# Altium PCB TRUMAN_PCB.PcbDoc (part 1 of 5)
Units mil, origin at the board's own origin, x right, y up, seen from the top; angles counter-clockwise.
Board outline 8050 x 5340 mil, 2 copper layers (Top Layer, Bottom Layer); 272 components, 210 nets, 840 pads, 280 vias.
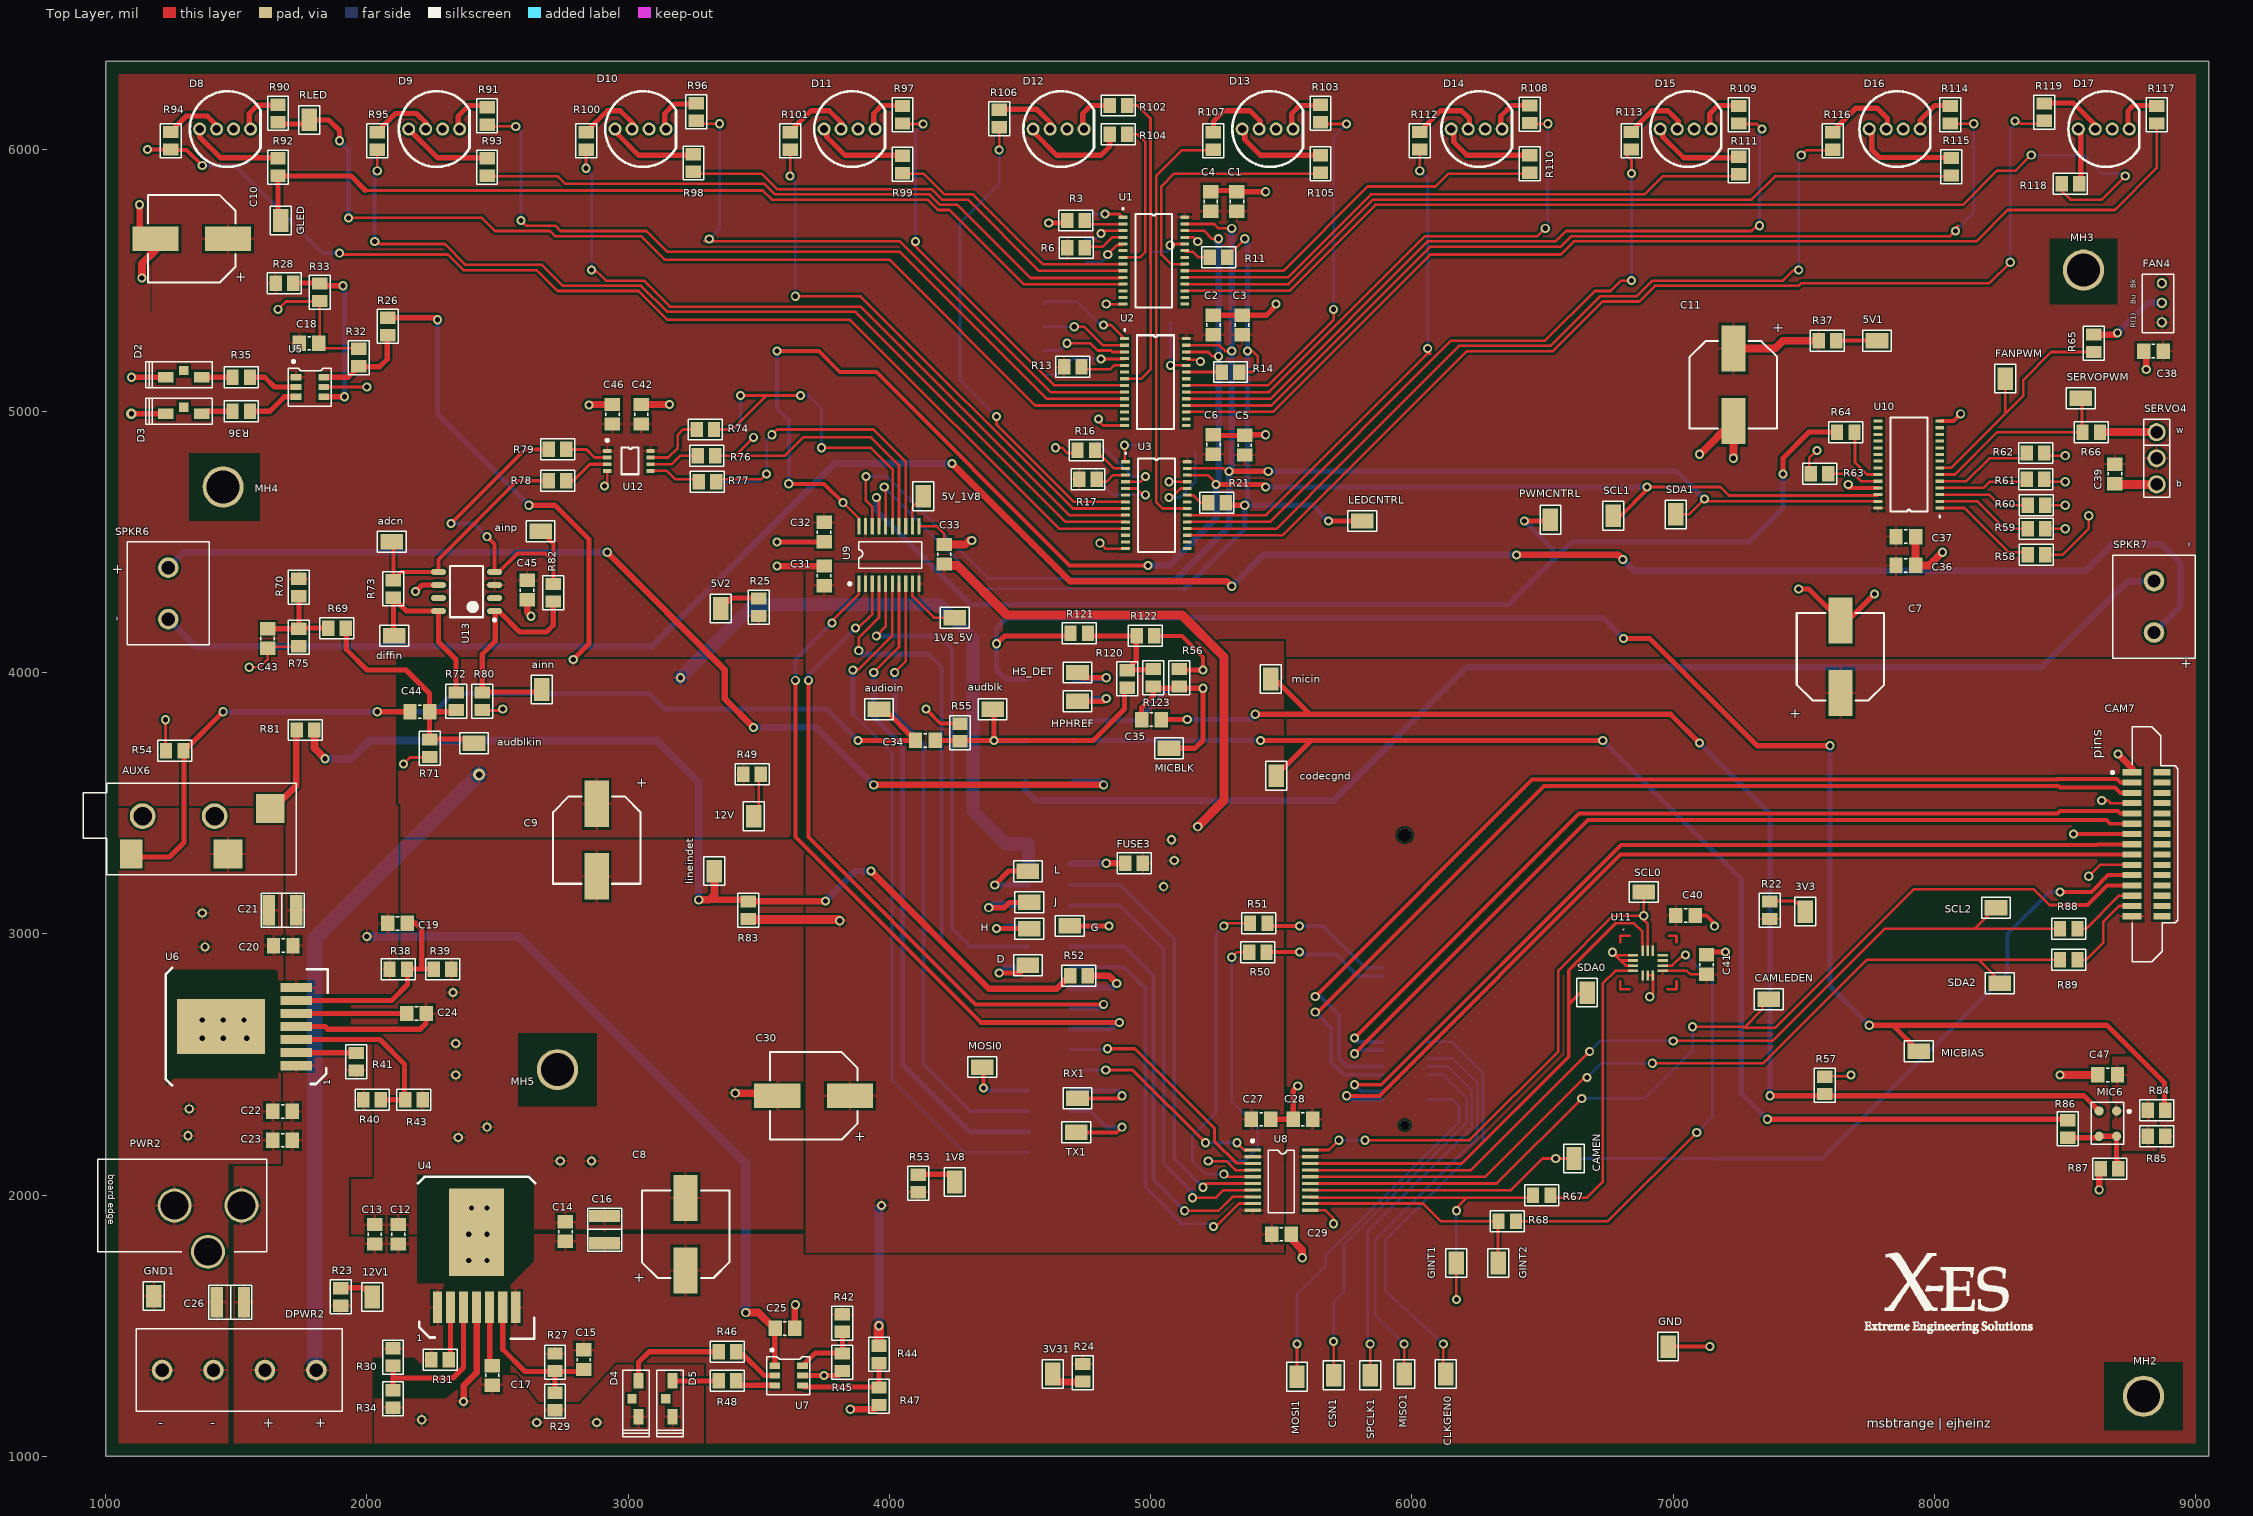
[diagram p0: Top Layer view]
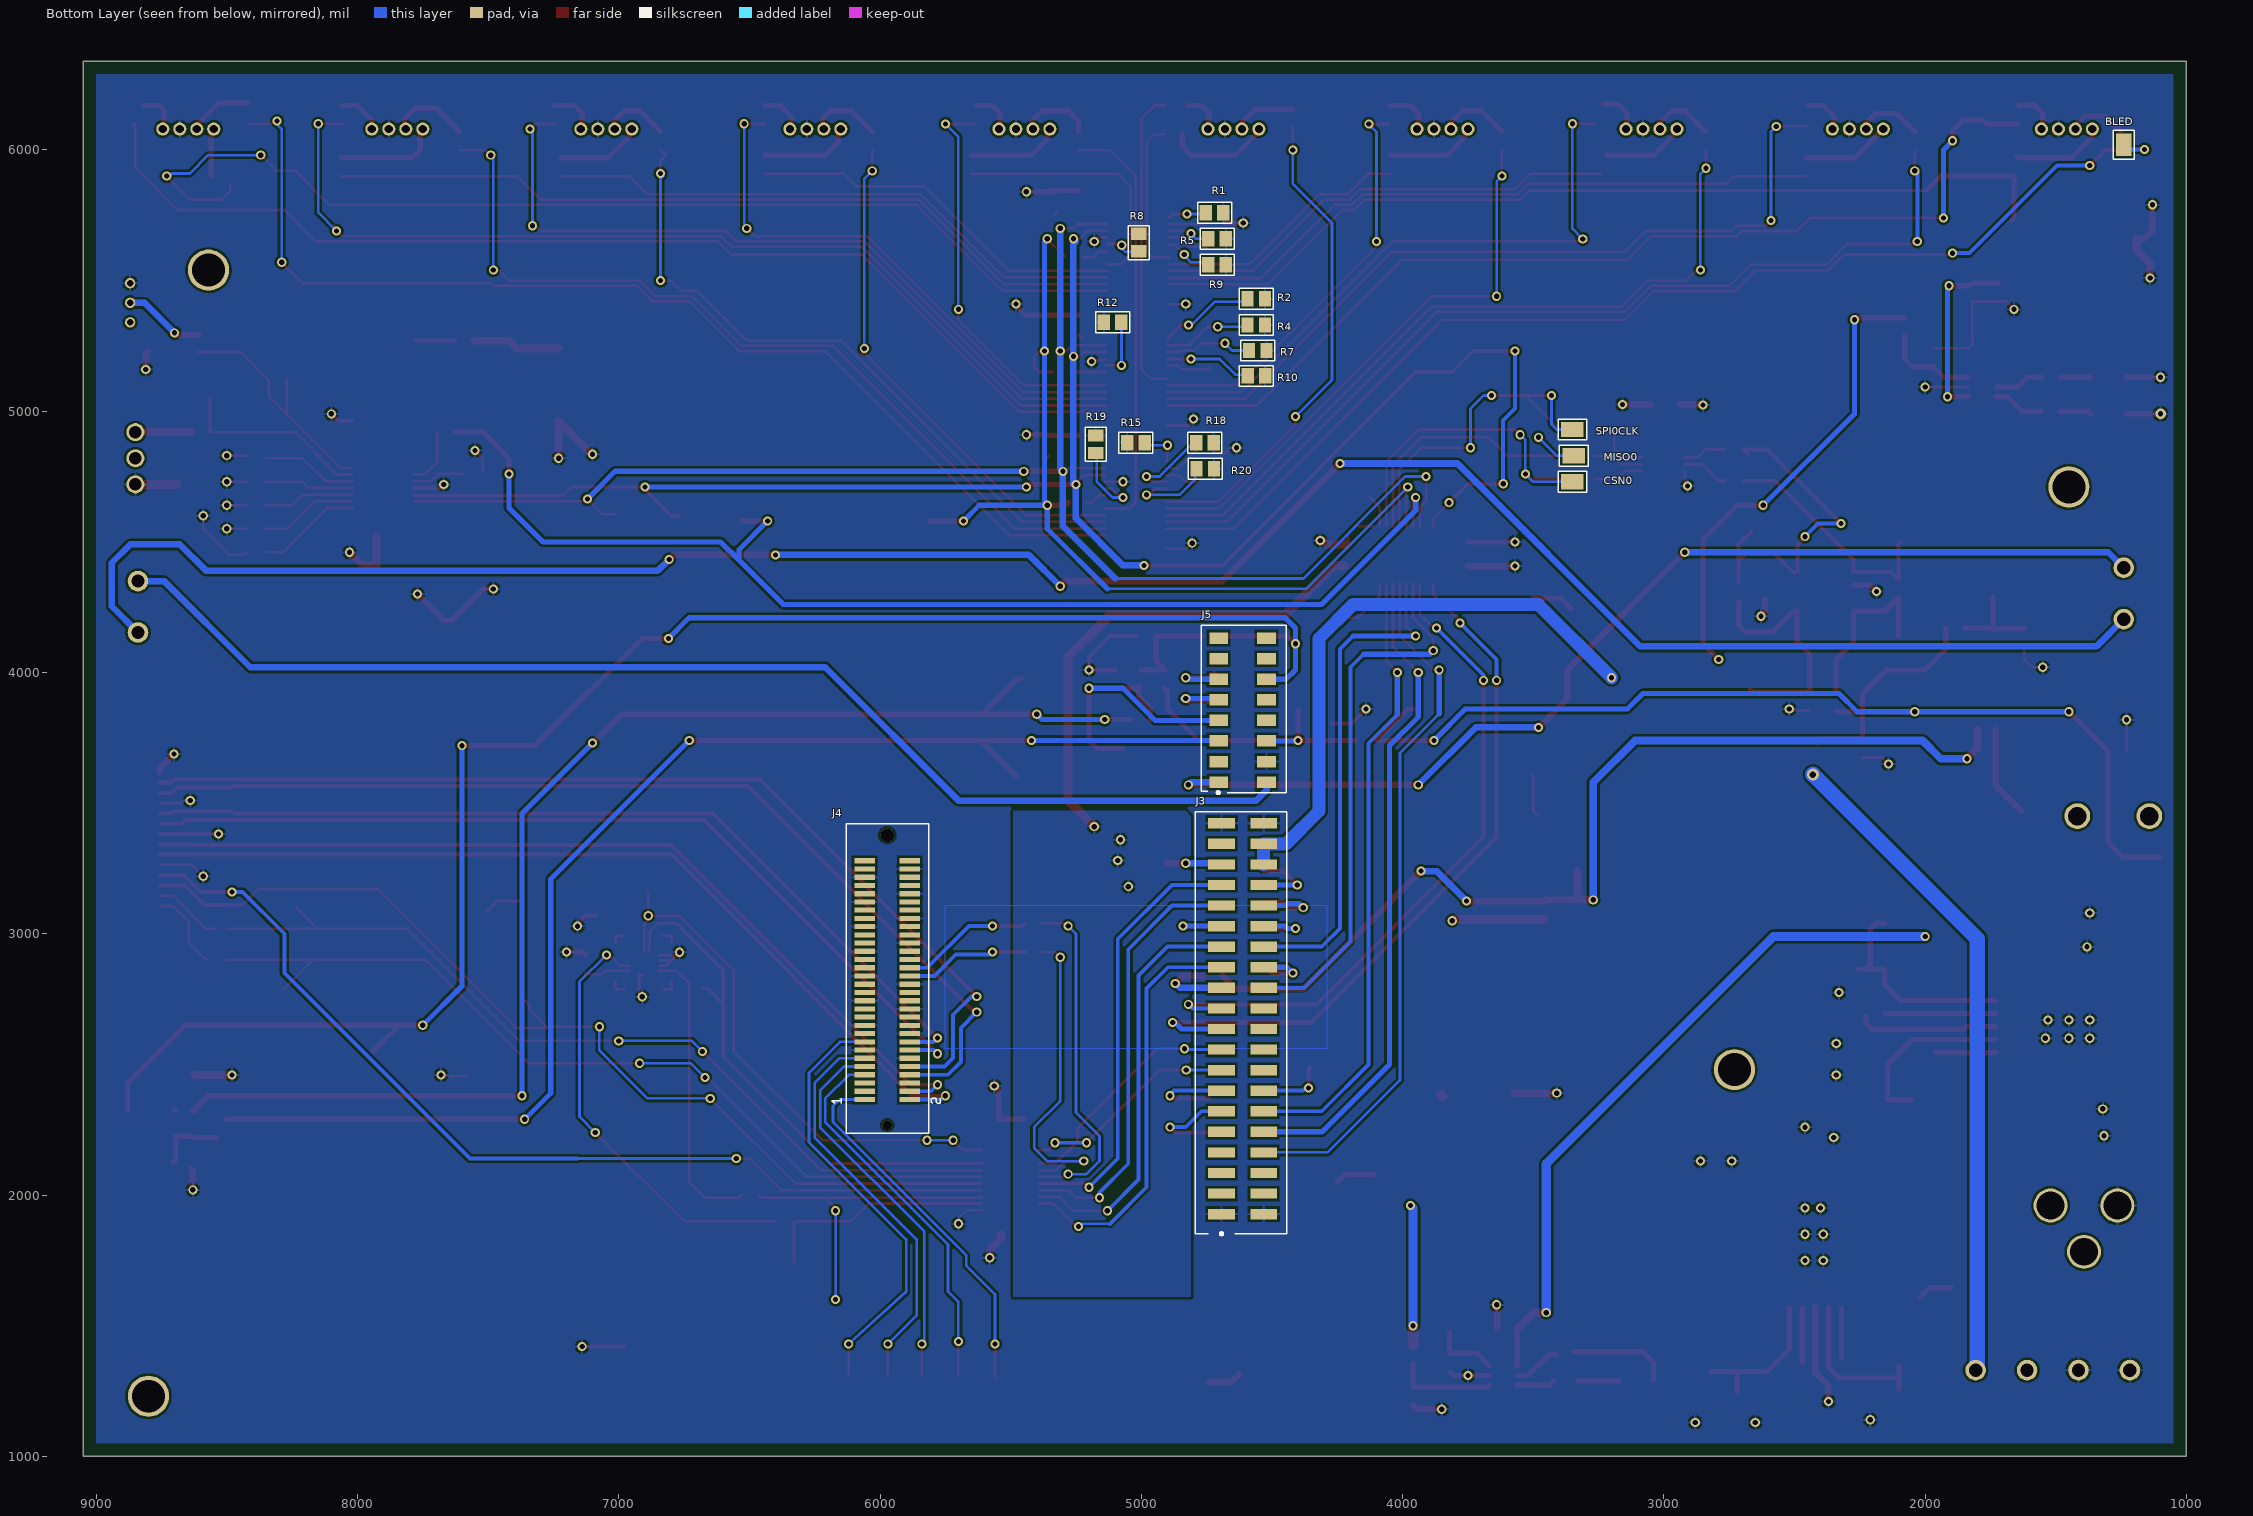
[diagram p1: Bottom Layer view, seen from below]

## Layer stack, top to bottom
Top Solder: solder mask 0.4, Solder Resist, Dk 3.5
Top Layer: signal copper 1.4
Dielectric 1: dielectric 12.6, FR-4, Dk 4.8
Bottom Layer: signal copper 1.4
Bottom Solder: solder mask 0.4, Solder Resist, Dk 3.5

## Board outline
1000,1000 9050,1000 9050,6340 1000,6340

## Design rules (kind name [scope] priority, off if disabled: settings)
BoardOutlineClearance [All] p1: gap=10 ignorepadtopadclearanceinfootprint=FALSE except(0: Arc-SplitContinuation Track-SplitContinuation SMDPad-SplitContinuation THPad-SplitContinuation Via-SplitContinuation Fill-SplitContinuation Poly-SplitContinuation Region-SplitContinuation Text-SplitContinuation; 50: Track-OutlineEdge SMDPad-OutlineEdge THPad-OutlineEdge Via-OutlineEdge Fill-OutlineEdge Poly-OutlineEdge Region-OutlineEdge)
Clearance [All] p1: gap=9 ignorepadtopadclearanceinfootprint=FALSE except(0: Arc-Hole Track-Hole SMDPad-Hole THPad-Hole Via-Hole Fill-Hole Poly-Hole Region-Hole Text-Hole)
DiffPairsRouting [All] p1: maxlimit=10 minlimit=10 mostfreqgap=10 toplayer_minwidth=15 toplayer_maxwidth=15 toplayer_prefwidth=15 bottomlayer_minwidth=15 bottomlayer_maxwidth=15 bottomlayer_prefwidth=15 maxuncoupledlength=500
HoleSize [All] p1: absolutevalues=TRUE maxlimit=150 minlimit=15 maxpercent=80.000 minpercent=20.000
MinimumAnnularRing [All] p1: minimumring=6
MinimumSolderMaskSliver [All] p1: minsoldermaskwidth=2.5
PolygonConnect [All] p1: connectstyle=Relief reliefconductorwidth=10 reliefentries=4 polygonreliefangle="90 Angle" airgapwidth=10
RoutingVias [All] p1: holewidth=28 width=50 viastyle="Through Hole" minholewidth=28 minwidth=50 maxholewidth=28 maxwidth=50
SilkToSolderMaskClearance [IsPad] p1 off: minsilkscreentomaskgap=10 clearancetoexposedcopper=TRUE
SolderMaskExpansion [All] p1: expansion=4
Width [All] p1: maxlimit=200 minlimit=10 preferedwidth=20
26 further rules are at their usual default settings.

## Classes and differential pairs
component class "09 LEDs(2)": BLED D8 D9 D10 D11 D12 D13 D14 D15 D16 D17 GLED R90 R91 R92 R93 R94 R95 R96 R97 R98 R99 R100 R101 R102 R103 R104 R105 R106 R107 R108 R109 R110 R111 R112 R113 R114 R115 R116 R117 R118 R119 RLED
component class "08 Camera": CAM7 R88 R89
component class "07 Audio": adcn ainn ainp audblkin audioin AUX6 C42 C43 C44 C45 C46 C47 codecgnd diffin lineindet MIC6 MICBIAS micin R69 R70 R71 R72 R73 R74 R75 R76 R77 R78 R79 R80 R81 R82 R83 R84 R85 R86 R87 SPKR6 SPKR7 U12 U13
component class "06 Gyro": C40 C41 R67 R68 U11
component class "05 SERVO_FAN": C36 C37 C38 C39 FAN4 FANPWM R58 R59 R60 R61 R62 R63 R64 R65 R66 SERVO4 SERVOPWM U10
component class "04 DragonBoard_INTF": 1V8 1V8_5V 5V_1V8 audblk C27 C28 C29 C30 C31 C32 C33 C34 C35 CAMEN CAMLEDEN CLKGEN0 CSN0 CSN1 D FUSE3 G GINT1 GINT2 H HPHREF HS_DET J J3 J4 J5 L LEDCNTRL MICBLK MISO0 MISO1 MOSI0 MOSI1 PWMCNTRL R50 R51 R52 R53 R54 R55 R56 R57 R120 R121 R122 R123 RX1 SCL0 SCL1 SCL2 SDA0 SDA1 SDA2 SPCLK1 SPI0CLK TX1 U8 U9
component class "03 POWER": 3V3 3V31 5V1 5V2 12V 12V1 C7 C8 C9 C10 C11 C12 C13 C14 C15 C16 C17 C18 C19 C20 C21 C22 C23 C24 C25 C26 D2 D3 D4 D5 DPWR2 GND GND1 MH2 MH3 MH4 MH5 PWR2 R22 R23 R24 R25 R26 R27 R28 R29 R30 R31 R32 R33 R34 R35 R36 R37 R38 R39 R40 R41 R42 R43 R44 R45 R46 R47 R48 R49 U4 U5 U6 U7
component class "02 LEDs": C1 C2 C3 C4 C5 C6 R1 R2 R3 R4 R5 R6 R7 R8 R9 R10 R11 R12 R13 R14 R15 R16 R17 R18 R19 R20 R21 U1 U2 U3
differential pair audio_adc_in: +audio_adc_in_p -audio_adc_in_n
differential pair CAM_CLK: +CAM_CLK_P -CAM_CLK_N
differential pair CAM_D0: +CAM_D0_P -CAM_D0_N
differential pair CAM_D1: +CAM_D1_P -CAM_D1_N

## Components (designator, comment, footprint, x,y, rotation, side; value= is the part's Value field where it differs from the comment)
1V8 "TP" TestPoint_0805 4250,2055 r90 top (schematic designator TP30)
1V8_5V "TP" TestPoint_0805 4245,4210 r180 top (schematic designator TP40)
3V3 "TP" TestPoint_0805 7505,3090 r90 top (schematic designator TP3)
3V31 "TP" TestPoint_0805 4625,1320 r90 top (schematic designator TP2)
5V1 "TP" TestPoint_0805 7775,5270 r180 top (schematic designator TP6)
5V2 "TP" TestPoint_0805 3355,4250 r90 top (schematic designator TP5)
5V_1V8 "TP" TestPoint_0805 4130,4680 r90 top (schematic designator TP41)
12V "TP" TestPoint_0805 3480,3455 r90 top (schematic designator TP7)
12V1 "TP" TestPoint_0805 2020,1615 r90 top (schematic designator TP4)
adcn "TP" TestPoint_0805 2090,4500 r180 top (schematic designator TP49)
ainn "TP" TestPoint_0805 2670,3940 r90 top (schematic designator TP52)
ainp "TP" TestPoint_0805 2660,4540 r180 top (schematic designator TP53)
audblk "TP" TestPoint_0805 4390,3860 r180 top (schematic designator TP42)
audblkin "TP" TestPoint_0805 2415,3730 r0 top (schematic designator TP50)
audioin "TP" TestPoint_0805 3955,3860 r180 top (schematic designator TP51)
AUX6 "CP-3523MJCT-ND" Audio_Conn_Mono 1004.02,3450.47 r180 top
BLED "TP" TestPoint_0805 1240,6025 r90 bottom (schematic designator TP64)
C1 "CAP_0805_10u_16V" CAPC2012X135N 5330,5802.6 r270 top value=10uF
C2 "CAP_0805_10u_16V" CAPC2012X135N 5240,5330 r270 top value=10uF
C3 "CAP_0805_.1u_250V" CAPC2012X135N 5350,5330 r270 top value=.1uF
C4 "CAP_0805_.1u_250V" CAPC2012X135N 5230,5802.6 r270 top value=.1uF
C5 "CAP_0805_10u_16V" CAPC2012X135N 5360,4870 r270 top value=10uF
C6 "CAP_0805_.1u_250V" CAPC2012X135N 5240,4872.6 r270 top value=.1uF
C7 "CAP ALUM 220UF 20% 25V SMD" CAP_RADIAL 7640,4060 r90 top
C8 "CAP ALUM 220UF 20% 25V SMD" CAP_RADIAL 3220,1850 r90 top
C9 "CAP ALUM 220UF 20% 25V SMD" CAP_RADIAL 2880,3358.78 r270 top
C10 "CAP ALUM 220UF 20% 25V SMD" CAP_RADIAL 1330,5660 r180 top
C11 "CAP ALUM 220UF 20% 25V SMD" CAP_RADIAL 7230,5101.22 r270 top
C12 "CAP_0805_1u_100V" CAPC2012X135N 2120,1850 r270 top value=1uF
C13 "CAP_0805_22u_25V" CAPC2012X135N 2030,1850 r270 top value=22uF
C14 "CAP_0805_1u_100V" CAPC2012X135N 2760,1860 r270 top value=1uF
C15 "CAP_0805_m22n" CAPC2012X135N 2830,1370 r90 top value=22nF
C16 "CAP_1210_100u_10V" FP_1210 2910,1920 r270 top value=100uF
C17 "CAP_0805_m22n" CAPC2012X135N 2480,1310 r90 top value=22nF
C18 "CAP_0805_.1u_250V" CAPC2012X135N 1779,5260 r180 top value=.1uF
C19 "CAP_0805_m22n" CAPC2012X135N 2117.4,3040 r180 top value=22nF
C20 "CAP_0805_10u_16V" CAPC2012X135N 1680,2955 r0 top value=10uF
C21 "CAP_1210_100u_10V" FP_1210 1625,3090 r0 top value=100uF
C22 "CAP_0805_1u_100V" CAPC2012X135N 1677.4,2320 r0 top value=1uF
C23 "CAP_0805_22u_25V" CAPC2012X135N 1677.4,2210 r0 top value=22uF
C24 "CAP_0805_m22n" CAPC2012X135N 2190,2695 r180 top value=22nF
C25 "CAP_0805_.1u_250V" CAPC2012X135N 3600,1490 r180 top value=.1uF
C26 "CAP_1210_100u_10V" FP_1210 1530,1590 r180 top value=100uF
C27 "CAP_0805_.1u_250V" CAPC2012X135N 5422.6,2290 r0 top value=.1uF
C28 "CAP_0805_.1u_250V" CAPC2012X135N 5582.6,2290 r0 top value=.1uF
C29 "CAP_0805_10u_16V" CAPC2012X135N 5500,1850 r180 top value=10uF
C30 "CAP ALUM 220UF 20% 25V SMD" CAP_RADIAL 3710,2380 r180 top
C31 "CAP_0805_.1u_250V" CAPC2012X135N 3750,4370 r90 top value=.1uF
C32 "CAP_0805_.1u_250V" CAPC2012X135N 3750,4537.4 r90 top value=.1uF
C33 "CAP_0805_10u_16V" CAPC2012X135N 4210,4452.6 r270 top value=10uF
C34 "CAP_0805_22u_25V" CAPC2012X135N 4137.4,3740 r0 top value=22uF
C35 "CAP_0805_22u_25V" CAPC2012X135N 5002.6,3820 r180 top value=22uF
C36 "CAP_0805_10u_16V" CAPC2012X135N 7890,4410 r180 top value=10uF
C37 "CAP_0805_.1u_250V" CAPC2012X135N 7890,4520 r180 top value=.1uF
C38 "CAP_0805_10u_16V" CAPC2012X135N 8837.4,5230 r180 top value=10uF
C39 "CAP_0805_10u_16V" CAPC2012X135N 8690,4760 r90 top value=10uF
C40 "CAP_0805_.1u_250V" CAPC2012X135N 7047.4,3070 r180 top value=.1uF
C41 "CAP_0805_.1u_250V" CAPC2012X135N 7127.32,2881.85 r270 top value=.1uF
C42 "CAP_0805_10u_16V" CAPC2012X135N 3050,4988.39 r90 top value=10uF
C43 "CAP_0805_10u_16V" CAPC2012X135N 1620,4130 r90 top value=10uF
C44 "CAP_0805_22u_25V_BLOCK" CAPC2012X135N 2202.6,3850 r0 top value=22uF
C45 "CAP_0805_.1u_250V" CAPC2012X135N 2613.6,4315.39 r90 top value=.1uF
C46 "CAP_0805_.1u_250V" CAPC2012X135N 2940,4988.39 r270 top value=.1uF
C47 "CAP_0805_.1u_250V" CAPC2012X135N 8662.6,2460 r180 top value=.1uF
CAM7 "A101418CT-ND" ZIF_15pin 8755.83,3342.52 r90 top
CAMEN "TP" TestPoint_0805 6620,2145 r90 top (schematic designator TP22)
CAMLEDEN "TP" TestPoint_0805 7360,2750 r180 top (schematic designator TP21)
CLKGEN0 "TP" TestPoint_0805 6130,1320 r90 top (schematic designator TP24)
codecgnd "TP" TestPoint_0805 5480,3610 r90 top (schematic designator TP57)
CSN0 "TP" TestPoint_0805 3345,4730 r180 bottom (schematic designator TP39)
CSN1 "TP" TestPoint_0805 5700,1315 r90 top (schematic designator TP14)
D "TP" TestPoint_0805 4525,2880 r180 top (schematic designator TP27)
D2 "LED_RED_636nm" POWERLED_FP 1299,5130 r0 top
D3 "LED_RED_636nm" POWERLED_FP 1299,4990 r0 top
D4 "LED_RED_636nm" POWERLED_FP 3040,1220 r90 top
D5 "LED_RED_636nm" POWERLED_FP 3170,1220 r90 top
D8 "RGB_LED" RGB_LED 1480,6080 r270 top
D9 "RGB_LED" RGB_LED 2280,6080 r270 top
D10 "RGB_LED" RGB_LED 3070,6080 r270 top
D11 "RGB_LED" RGB_LED 3870,6080 r270 top
D12 "RGB_LED" RGB_LED 4670,6080 r270 top
D13 "RGB_LED" RGB_LED 5470,6080 r270 top
D14 "RGB_LED" RGB_LED 6270,6080 r270 top
D15 "RGB_LED" RGB_LED 7070,6080 r270 top
D16 "RGB_LED" RGB_LED 7870,6080 r270 top
D17 "RGB_LED" RGB_LED 8670,6080 r270 top
diffin "TP" TestPoint_0805 2100,4140 r180 top (schematic designator TP48)
DPWR2 "Display_Power" PHOENIX_4POS_1935187 1216.3,1330 r0 top
FAN4 "ASB0305MA-CA8Z" FAN_HEADER 8870,5415 r90 top
FANPWM "TP" TestPoint_0805 8270,5130 r90 top (schematic designator TP47)
FUSE3 "FUSE_0805_1A_32VDC" RES0805 4936.54,3270 r180 top
G "TP" TestPoint_0805 4685,3030 r180 top (schematic designator TP28)
GINT1 "TP" TestPoint_0805 6170,1745 r90 top (schematic designator TP23)
GINT2 "TP" TestPoint_0805 6330,1745 r90 top (schematic designator TP26)
GLED "TP" TestPoint_0805 1670,5735 r90 top (schematic designator TP63)
GND "TP" TestPoint_0805 6980,1425 r90 top (schematic designator TP8)
GND1 "TP" TestPoint_0805 1185,1618.31 r90 top (schematic designator TP9)
H "TP" TestPoint_0805 4530,3020 r180 top (schematic designator TP29)
HPHREF "TP" TestPoint_0805 4715,3890 r180 top (schematic designator TP44)
HS_DET "TP" TestPoint_0805 4715,4000 r180 top (schematic designator TP45)
J "TP" TestPoint_0805 4530,3120 r180 top (schematic designator TP31)
J3 "DragonBoard_LOW_SPEED" 57202_40_PIN_HEADER 4692.91,1927.01 r270 bottom locked
J4 "DragonBoard_HIGH_SPEED" DB_HIGH_SPEED 6059.06,2365.98 r90 bottom locked
J5 "DragonBoard_ANALOG" 16_PIN_ANALOG_CONN 4520.67,3580.55 r90 bottom locked
L "TP" TestPoint_0805 4525,3240 r180 top (schematic designator TP32)
LEDCNTRL "TP" TestPoint_0805 5815,4580 r0 top (schematic designator TP36)
lineindet "TP" TestPoint_0805 3330,3245 r90 top (schematic designator TP54)
MH2 "MOUNTINGHOLE" MOUNTINGHOLE 8800,1230 r0 top
MH3 "MOUNTINGHOLE" MOUNTINGHOLE 8570,5540 r0 top
MH4 "MOUNTINGHOLE" MOUNTINGHOLE 1450,4710 r0 top
MH5 "MOUNTINGHOLE" MOUNTINGHOLE 2730,2480 r0 top
MIC6 "SPU0410HR5H-PB" MIC_FP 8630,2225 r0 top
MICBIAS "TP" TestPoint_0805 7935,2550 r180 top (schematic designator TP55)
MICBLK "TP" TestPoint_0805 5065,3710 r180 top (schematic designator TP43)
micin "TP" TestPoint_0805 5460,3980 r90 top (schematic designator TP56)
MISO0 "TP" TestPoint_0805 3340,4830 r180 bottom (schematic designator TP38)
MISO1 "TP" TestPoint_0805 5970,1320 r90 top (schematic designator TP19)
MOSI0 "TP" TestPoint_0805 4350,2490 r180 top (schematic designator TP13)
MOSI1 "TP" TestPoint_0805 5560,1300 r270 top (schematic designator TP10)
PWMCNTRL "TP" TestPoint_0805 6530,4590 r90 top (schematic designator TP35)
PWR2 "EJ503A" BARRELJACK 1392.05,1782.83 r270 top
R1 "RES_0805_10K" RES0805 4719.57,5760 r0 bottom
R2 "RES_0805_10K" RES0805 4560,5430 r0 bottom
R3 "RES_0805_10K" RES0805 4713.46,5730 r0 top
R4 "RES_0805_10K" RES0805 4560,5330 r0 bottom
R5 "RES_0805_10K" RES0805 4710,5660 r0 bottom
R6 "RES_0805_10K" RES0805 4714.57,5625 r0 top
R7 "RES_0805_10K" RES0805 4554.55,5232.51 r0 bottom
R8 "RES_0805_10K" RES0805 5010,5645.43 r90 bottom
R9 "RES_0805_10K" RES0805 4710,5560 r0 bottom
R10 "RES_0805_10K" RES0805 4559.57,5135 r0 bottom
R11 "RES_0805_10K" RES0805 5260,5590 r0 top
R12 "RES_0805_10K" RES0805 5110,5340 r0 bottom
R13 "RES_0805_10K" RES0805 4701.97,5170 r0 top
R14 "RES_0805_10K" RES0805 5305.43,5150 r0 top
R15 "RES_0805_10K" RES0805 5020.87,4880 r180 bottom
R16 "RES_0805_10K" RES0805 4753.46,4850 r0 top
R17 "RES_0805_10K" RES0805 4760,4740 r0 top
R18 "RES_0805_10K" RES0805 4756.54,4880 r0 bottom
R19 "RES_0805_10K" RES0805 5175,4873.62 r90 bottom
R20 "RES_0805_10K" RES0805 4755,4779.53 r0 bottom
R21 "RES_0805_10K" RES0805 5253.46,4650 r0 top
R22 "RES_0805_1K" RES0805 7370,3090 r90 top
R23 "RES_0805_1K" RES0805 1900,1610 r90 top
R24 "RES_0805_1K" RES0805 4740,1320 r90 top
R25 "RES_0805_1K" RES0805 3500,4250 r90 top
R26 "RES_0805_1.74M" RES0805 2080,5324.57 r90 top
R27 "RES_6.2K" RES0805 2720,1360 r90 top
R28 "RES_1.43M" RES0805 1684.43,5490 r180 top
R29 "RES_0805_2K" RES0805 2720,1210 r270 top
R30 "RES_0805_23.2K" RES0805 2100,1380 r90 top
R31 "RES_63.4K" RES0805 2280,1370 r0 top
R32 "RES_0805_226K" RES0805 1969,5205.43 r270 top
R33 "RES_549K" RES0805 1819,5455.43 r90 top
R34 "RES_0805_11.8K" RES0805 2100,1220 r90 top
R35 "RES_787" RES0805 1519,5130 r0 top
R36 "RES_787" RES0805 1519,5000 r0 top
R37 "RES_0805_1K" RES0805 7590,5270 r180 top
R38 "RES_5.23K" RES0805 2120,2865 r180 top
R39 "RES_0805_1K" RES0805 2290,2865 r0 top
R40 "RES_0805_23.2K" RES0805 2020,2365 r180 top
R41 "RES_0805_100K" RES0805 1960,2510 r90 top
R42 "RES_1.13M" RES0805 3820,1510 r90 top
R43 "RES_0805_11.8K" RES0805 2180,2365 r180 top
R44 "RES_0805_255K" RES0805 3960,1390 r90 top
R45 "RES_887K" RES0805 3820,1360 r90 top
R46 "RES_787" RES0805 3380,1400 r180 top
R47 "RES_0805_1.74M" RES0805 3960,1230 r90 top
R48 "RES_787" RES0805 3380,1290 r180 top
R49 "RES_0805_1K" RES0805 3474.57,3610 r0 top
R50 "RES_0805_JMP" RES0805 5410,2930 r180 top
R51 "RES_0805_JMP" RES0805 5413.46,3040 r180 top
R52 "RES_0805_10K" RES0805 4725.43,2840 r0 top
R53 "RES_0805_1K" RES0805 4110,2044.57 r90 top
R54 "RES_0805_10K" RES0805 1264.57,3700 r180 top
R55 "RES_0805_JMP" RES0805 4270,3770 r90 top
R56 "RES_0805_JMP" RES0805 5110,3980 r270 top
R57 "RES_0805_10K" RES0805 7580,2420 r270 top
R58 "RES_0805_10K" RES0805 8390,4450 r180 top
R59 "RES_0805_10K" RES0805 8390,4550 r180 top
R60 "RES_0805_10K" RES0805 8390,4640 r180 top
R61 "RES_0805_10K" RES0805 8386.54,4740 r180 top
R62 "RES_0805_10K" RES0805 8386.54,4840 r180 top
R63 "RES_0805_10K" RES0805 7560,4760 r180 top
R64 "RES_0805_10K" RES0805 7660,4920 r180 top
R65 "RES_0805_2K" RES0805 8610,5260 r90 top
R66 "RES_0805_10K" RES0805 8600,4920 r0 top
R67 "RES_0805_10K" RES0805 6496.54,2000 r180 top
R68 "RES_0805_10K" RES0805 6364.57,1900 r0 top
R69 "RES_0805_10K" RES0805 1885.43,4170 r0 top
R70 "RES_0805_10K" RES0805 1740,4325.43 r90 top
R71 "RES_0805_JMP" RES0805 2240,3710 r90 top
R72 "RES_0805_499" RES0805 2341.61,3890 r90 top
R73 "RES_0805_1.2K" RES0805 2101.61,4320 r90 top
R74 "RES_0805_JMP" RES0805 3295.43,4930 r0 top
R75 "RES_0805_10K" RES0805 1740,4134.57 r90 top
R76 "RES_0805_JMP" RES0805 3300,4830 r0 top
R77 "RES_0805_JMP" RES0805 3303.46,4730 r0 top
R78 "RES_0805_49.9" RES0805 2730,4733.82 r0 top
R79 "RES_0805_49.9" RES0805 2730,4853.82 r0 top
R80 "RES_0805_499" RES0805 2441.61,3890 r90 top
R81 "RES_0805_JMP" RES0805 1764.57,3780 r0 top
R82 "RES_0805_1.2K" RES0805 2713.6,4305.39 r90 top
R83 "RES_0805_10K" RES0805 3460,3090 r270 top
R84 "RES_0805_JMP" RES0805 8850,2325 r0 top
R85 "RES_0805_JMP" RES0805 8850,2225 r0 top
R86 "RES_0805_JMP" RES0805 8510,2253.46 r270 top
R87 "RES_0805_JMP" RES0805 8670,2100 r0 top
R88 "RES_0805_JMP" RES0805 8513.46,3020 r0 top
R89 "RES_0805_JMP" RES0805 8513.46,2900 r0 top
R90 "RES_0805_309" RES0805 1660,6140 r90 top
R91 "RES_0805_309" RES0805 2460,6130 r90 top
R92 "169 Ohm" RES0805 1660,5934.57 r90 top
R93 "169 Ohm" RES0805 2460,5934.57 r90 top
R94 "169 Ohm" RES0805 1250,6035.43 r90 top
R95 "169 Ohm" RES0805 2040,6034.57 r90 top
R96 "RES_0805_309" RES0805 3260,6145.43 r90 top
R97 "RES_0805_309" RES0805 4050,6134.57 r90 top
R98 "169 Ohm" RES0805 3250,5950 r90 top
R99 "169 Ohm" RES0805 4050,5944.57 r90 top
R100 "169 Ohm" RES0805 2840,6034.57 r90 top
R101 "169 Ohm" RES0805 3620,6034.57 r90 top
R102 "RES_0805_309" RES0805 4876.54,6170 r180 top
R103 "RES_0805_309" RES0805 5650,6140 r90 top
R104 "169 Ohm" RES0805 4876.54,6060 r180 top
R105 "169 Ohm" RES0805 5650,5946.54 r90 top
R106 "169 Ohm" RES0805 4420,6120 r90 top
R107 "169 Ohm" RES0805 5240,6034.57 r90 top
R108 "RES_0805_309" RES0805 6450,6136.54 r90 top
R109 "RES_0805_309" RES0805 7250,6134.57 r90 top
R110 "169 Ohm" RES0805 6450,5946.54 r90 top
R111 "169 Ohm" RES0805 7250,5940 r90 top
R112 "169 Ohm" RES0805 6030,6035.43 r90 top
R113 "169 Ohm" RES0805 6840,6035.43 r90 top
R114 "RES_0805_309" RES0805 8060,6134.57 r90 top
R115 "169 Ohm" RES0805 8064.71,5935.43 r90 top
R116 "169 Ohm" RES0805 7610,6034.57 r90 top
R117 "RES_0805_309" RES0805 8850,6134.57 r90 top
R118 "169 Ohm" RES0805 8520,5870 r0 top
R119 "169 Ohm" RES0805 8420,6144.57 r90 top
R120 "RES_0805_100K" RES0805 4910,3975.43 r90 top
R121 "RES_0805_100K" RES0805 4726.54,4150 r180 top
R122 "RES_0805_100K" RES0805 4980,4140 r180 top
R123 "RES_0805_100K" RES0805 5010,3980 r90 top
RLED "TP" TestPoint_0805 1780,6120 r90 top (schematic designator TP62)
RX1 "TP" TestPoint_0805 4715,2370 r180 top (schematic designator TP12)
SCL0 "TP" TestPoint_0805 6882.32,3160 r180 top (schematic designator TP15)
SCL1 "TP" TestPoint_0805 6770,4605 r90 top (schematic designator TP33)
SCL2 "TP" TestPoint_0805 8230,3100 r180 top (schematic designator TP18)
SDA0 "TP" TestPoint_0805 6670,2770 r270 top (schematic designator TP17)
SDA1 "TP" TestPoint_0805 7010,4610 r90 top (schematic designator TP34)
SDA2 "TP" TestPoint_0805 8245,2810 r180 top (schematic designator TP20)
SERVO4 "61300311121" SERVO_HEADER 8850,4920 r0 top
SERVOPWM "TP" TestPoint_0805 8555,5050 r180 top (schematic designator TP46)
SPCLK1 "TP" TestPoint_0805 5840,1315 r90 top (schematic designator TP16)
SPI0CLK "TP" TestPoint_0805 3345,4930 r180 bottom (schematic designator TP37)
SPKR6 "CDS-27204-L100" PHOENIX_2POS_1935161 1240,4401.21 r270 top
SPKR7 "CDS-27204-L100" PHOENIX_2POS_1935161 8840,4153.15 r90 top
TX1 "TP" TestPoint_0805 4710,2240 r180 top (schematic designator TP11)
U1 "PCA9685PW" TSSOP28 4893.78,5742.36 r0 top
U2 "PCA9685PW" TSSOP28 4900,5277.95 r0 top
U3 "PCA9685PW" TSSOP28 4903.78,4806.77 r0 top
U4 "LMZ12003" TO-PMOD-7 2420,1570 r0 top
U5 "TPS3779BDBVR" "DBV (R-PDSO-G6)" 1729,5130 r270 top
U6 "LMZ12003" TO-PMOD-7 1730,2645 r90 top
U7 "TPS3779BDBVR" "DBV (R-PDSO-G6)" 3560.9,1346.57 r270 top
U8 "TXS0108" TSSOP20 5390,2172.36 r0 top
U9 "TXS0108" TSSOP20 3883.23,4339.53 r90 top
U10 "PCA9685PW" TSSOP28 8020,4629.68 r180 top
U11 "LSM6DS3HTR" PQFN50P300X250X86_HS-15N 6902.6,2887.91 r0 top
U12 "AD7684BRMZRL7CT-ND" MSOP8 2920,4848.39 r0 top
U13 "AD8138ARZ-R7CT-ND" SOIC127P600X175-8N 2381.61,4310 r180 top

## Footprints (in the part's own frame and the unit in brackets; to place one, negate y for a bottom-side part, rotate by r counter-clockwise, add the part's x,y. Pads: shape width x height; smd on the part's side, far side on the other; paste and mask are expansions set on the pad)
16_PIN_ANALOG_CONN [mm]
  rect 1.12x1.83 smd: 1(0,4.65) 2(0,0) 3(2,4.65) 4(2,0) 5(4,4.65) 6(4,0) 7(6,4.65) 8(6,0) 9(8,4.65) 10(8,0) 11(10,4.65) 12(10,0) 13(12,4.65) 14(12,0) 15(14,4.65) 16(14,0)
  silkscreen extent -1.14,-1.91 15.24,6.35
57202_40_PIN_HEADER [mm]
  rect 1x2.6 smd: 1(0,0) 2(0,4.1) 3(-2,0) 4(-2,4.1) 5(-4,0) 6(-4,4.1) 7(-6,0) 8(-6,4.1) 9(-8,0) 10(-8,4.1) 11(-10,0) 12(-10,4.1) 13(-12,0) 14(-12,4.1) 15(-14,0) 16(-14,4.1) 17(-16,0) 18(-16,4.1) 19(-18,0) 20(-18,4.1) 21(-20,0) 22(-20,4.1) 23(-22,0) 24(-22,4.1) 25(-24,0) 26(-24,4.1) 27(-26,0) 28(-26,4.1) 29(-28,0) 30(-28,4.1) 31(-30,0) 32(-30,4.1) 33(-32,0) 34(-32,4.1) 35(-34,0) 36(-34,4.1) 37(-36,0) 38(-36,4.1) 39(-38,0) 40(-38,4.1)
  silkscreen extent -39.12,-2.54 2.03,6.35
Audio_Conn_Mono [mm]
  rect 2.2x2.8 smd: 1(-2.4,3.7)
  rect 2.8x2.8 smd: 2(-11.8,3.7) 3(-15.9,-0.75)
  round 2.5 hole 1.8 unplated: MH1(-3.5,0) MH2(-10.5,0)
  silkscreen extent -18.41,-3.18 2.29,5.71
BARRELJACK [mm]
  round 3.3 hole 2.7: 1(-4.5,3.25) 2(-4.5,-3.25) 3(0,0)
  silkscreen extent -9.02,-10.74 0,5.71
CAP_RADIAL [mm] "Aluminum Electrolytic Capacitor, Body 8.30x8.30x10.50mm, IPC Low Density"
  rect 4.5x2.35 smd: 1(-3.525,0) 2(3.525,0)
  silkscreen extent -4.25,-4.25 4.25,4.25, body extent -4.25,-4.25 4.25,4.25, height 10.5
CAPC2012X135N [mm]
  rect 1.3x1.5 smd: 1(-0.95,0) 2(0.95,0)
  silkscreen extent -0.15,-0.65 0.15,0.65
DB_HIGH_SPEED [mm]
  rect 0.5x2 smd: 1(0,0) 2(0,-4.4) 3(0.8,0) 4(0.8,-4.4) 5(1.6,0) 6(1.6,-4.4) 7(2.4,0) 8(2.4,-4.4) 9(3.2,0) 10(3.2,-4.4) 11(4,0) 12(4,-4.4) 13(4.8,0) 14(4.8,-4.4) 15(5.6,0) 16(5.6,-4.4) 17(6.4,0) 18(6.4,-4.4) 19(7.2,0) 20(7.2,-4.4) 21(8,0) 22(8,-4.4) 23(8.8,0) 24(8.8,-4.4) 25(9.6,0) 26(9.6,-4.4) 27(10.4,0) 28(10.4,-4.4) 29(11.2,0) 30(11.2,-4.4) 31(12,0) 32(12,-4.4) 33(12.8,0) 34(12.8,-4.4) 35(13.6,0) 36(13.6,-4.4) 37(14.4,0) 38(14.4,-4.4) 39(15.2,0) 40(15.2,-4.4) 41(16,0) 42(16,-4.4) 43(16.8,0) 44(16.8,-4.4) 45(17.6,0) 46(17.6,-4.4) 47(18.4,0) 48(18.4,-4.4) 49(19.2,0) 50(19.2,-4.4) 51(20,0) 52(20,-4.4) 53(20.8,0) 54(20.8,-4.4) 55(21.6,0) 56(21.6,-4.4) 57(22.4,0) 58(22.4,-4.4) 59(23.2,0) 60(23.2,-4.4)
  round 0.9 hole 0.9 unplated: MH1(-2.5,-2.2)
  round 1.3 hole 1.3 unplated: MH2(25.7,-2.2)
  silkscreen extent -3.3,-7.37 26.8,3.17
"DBV (R-PDSO-G6)" [mm] "6 pin dbv"
  rect 0.6x1.05 smd: 1(0,0) 2(0.95,0) 3(1.9,0) 4(1.9,2.7) 5(0.95,2.7) 6(0,2.7)
  silkscreen extent -1.65,-0.76 2.79,3.43
FAN_HEADER [mm]
  round 1 hole 0.65: 1(-1.905,0) 2(0,0) 3(1.905,0)
  silkscreen extent -2.92,-1.14 2.79,1.91
FP_1210 [mm]
  rect 1.2x3 smd: 1(0,0) 2(2.667,0)
  silkscreen extent -0.76,-1.65 3.43,1.65
MIC_FP [mm]
  round 0.9 smd: 1(1.7,2.46) 2(1.7,0) 3(0,0) 4(0,2.46)
  silkscreen extent -0.76,-0.76 3.05,3.3
MOUNTINGHOLE [mm] "mounting hole"
  round 4 hole 3.2 unplated: MH(0,0)
MSOP8 [mm]
  rect 0.8x0.38 smd: 1(0,0) 2(0,-0.65) 3(0,-1.3) 4(0,-1.95) 5(4.2,-1.95) 6(4.2,-1.3) 7(4.2,-0.65) 8(4.2,0)
  silkscreen extent -0.13,-2.28 3.05,1.14
PHOENIX_2POS_1935161 [mm]
  round 2 hole 1.3: 1(0,0) 2(5,0)
  silkscreen extent -2.5,-4 7.5,4
PHOENIX_4POS_1935187 [mm]
  round 2 hole 1.3: 1(15,0) 2(10,0) 3(5,0) 4(0,0)
  silkscreen extent -2.5,-4 17.5,4
POWERLED_FP [mm]
  rect 1.5x1 smd: 1(-1.75,0) 2(1.75,0)
  rect 0.9x0.9 smd: TH(0,0.65)
  silkscreen extent -3.68,-1.02 2.79,1.52
PQFN50P300X250X86_HS-15N [mm] "PQFN, 14-Leads, Body 3.00x2.50mm, Pitch 0.50mm, Thermal Pad 1.45x1.95mm, IPC Medium Density"
  rrect50% 1x0.25 smd mask+0.08: 1(-1.45,0.75)
  rect 1x0.25 smd mask+0.08: 2(-1.45,0.25) 3(-1.45,-0.25) 4(-1.45,-0.75) 8(1.45,-0.75) 9(1.45,-0.25) 10(1.45,0.25) 11(1.45,0.75)
  rect 0.25x1 smd mask+0.08: 5(-0.5,-1.2) 6(0,-1.2) 7(0.5,-1.2) 12(0.5,1.2) 13(0,1.2) 14(-0.5,1.2)
  Top Layer lines w0.254: -2.667,-1.778 -2.667,-2.54 -1.778,-2.54 ; -2.667,2.032 -2.667,2.667 -1.778,2.667 ; 1.905,-2.54 2.794,-2.54 2.794,-1.778 ; 2.032,2.667 2.794,2.667 2.794,2.032
  body extent -1.55,-1.25 1.55,1.26, height 0.86
RES0805 [mm]
  rect 1.2x1.5 smd: 1(-0.85,0) 2(0.85,0)
  silkscreen extent -1.65,-1.02 1.65,1.02
RGB_LED [mm]
  round 1.278 hole 0.8: 1(0,1.905) 2(0,0.254) 3(0,-1.397) 4(0,-3.048)
  silkscreen extent -3.68,-4 3.68,2.87
SERVO_HEADER [mm]
  round 1.75 hole 1.2: 1(0,0) 2(0,-2.54) 3(0,-5.08)
  silkscreen extent -1.27,-6.35 1.27,1.27
SOIC127P600X175-8N [mm] "SOIC, 8-Leads, Body 4.90x3.90mm, Pitch 1.27mm, IPC Medium Density"
  oval 1.45x0.6 smd: 1(-2.725,1.905) 2(-2.725,0.635) 3(-2.725,-0.635) 4(-2.725,-1.905) 5(2.725,-1.905) 6(2.725,-0.635) 7(2.725,0.635) 8(2.725,1.905)
  silkscreen extent -2.85,-2.5 1.6,2.88, body extent -2,-2.5 2,2.5, height 1.75
TestPoint_0805 [mm]
  rect 2.2x1.5 smd: 1(-0.127,0)
  silkscreen extent -1.52,-1.02 1.27,1.02
TO-PMOD-7 [mm]
  rect 0.89x3.06 smd: 1(-3.81,0) 2(-2.54,0) 3(-1.27,0) 4(0,0) 5(1.27,0) 6(2.54,0) 7(3.81,0)
  rect 5.35x8.54 smd: 8(0,7.305)
  silkscreen extent -5.71,-3.05 5.71,12.7
TSSOP20 [mm]
  rect 1.6x0.3 smd: 1(0,0) 2(0,-0.65) 3(0,-1.3) 4(0,-1.95) 5(0,-2.6) 6(0,-3.25) 7(0,-3.9) 8(0,-4.55) 9(0,-5.2) 10(0,-5.85) 11(5.6,-5.85) 12(5.6,-5.2) 13(5.6,-4.55) 14(5.6,-3.9) 15(5.6,-3.25) 16(5.6,-2.6) 17(5.6,-1.95) 18(5.6,-1.3) 19(5.6,-0.65) 20(5.6,0)
  silkscreen extent -0.13,-6.1 4.06,1.02
TSSOP28 [mm]
  rect 0.85x0.3 smd: 1(0,0) 2(0,-0.65) 3(0,-1.3) 4(0,-1.95) 5(0,-2.6) 6(0,-3.25) 7(0,-3.9) 8(0,-4.55) 9(0,-5.2) 10(0,-5.85) 11(0,-6.5) 12(0,-7.15) 13(0,-7.8) 14(0,-8.45) 15(6,-8.45) 16(6,-7.8) 17(6,-7.15) 18(6,-6.5) 19(6,-5.85) 20(6,-5.2) 21(6,-4.55) 22(6,-3.9) 23(6,-3.25) 24(6,-2.6) 25(6,-1.95) 26(6,-1.3) 27(6,-0.65) 28(6,0)
  silkscreen extent 0,-8.78 4.79,0.89
ZIF_15pin [mm]
  rect 0.6x1.85 smd: 1(7,0) 2(6,0) 3(5,0) 4(4,0) 5(3,0) 6(2,0) 7(1,0) 8(0,0) 9(-1,0) 10(-2,0) 11(-3,0) 12(-4,0) 13(-5,0) 14(-6,0) 15(-7,0)
  rect 0.6x1.65 smd: MP(-7,-2.9) MP(-6,-2.9) MP(-5,-2.9) MP(-4,-2.9) MP(-3,-2.9) MP(-2,-2.9) MP(-1,-2.9) MP(0,-2.9) MP(1,-2.9) MP(2,-2.9) MP(3,-2.9) MP(4,-2.9) MP(5,-2.9) MP(6,-2.9) MP(7,-2.9)
  silkscreen extent -11.43,-4.45 11.43,2.03

## Part data
1V8 1V8_5V 3V3 3V31 5V1 5V2 5V_1V8 12V 12V1 adcn ainn ainp audblk audblkin audioin BLED CAMEN CAMLEDEN CLKGEN0 codecgnd CSN0 CSN1 D diffin FANPWM G GINT1 GINT2 GLED GND GND1 H HPHREF HS_DET J L LEDCNTRL lineindet MICBIAS MICBLK micin MISO0 MISO1 MOSI0 MOSI1 PWMCNTRL RLED RX1 SCL0 SCL1 SCL2 SDA0 SDA1 SDA2 SERVOPWM SPCLK1 SPI0CLK TX1: "Testpoint_0805", Case/Package=0805, Colour=Natural, Manufacturer="TE Connectivity", Manufacturer Part Number=1625854-2, Max Operating Temperature=125°C, Min Operating Temperature=-55°C, Package Quantity=2000, Resistance=0mR, Supplier Part Number 1=A106144CT-ND, ComponentLink1Description=https://datasheet.ciiva.com/6439/eng-ds-1773266-a-6439169.pdf, ComponentLink1URL=https://datasheet.ciiva.com/6439/eng-ds-1773266-a-6439169.pdf, ComponentLink2Description=https://datasheet.ciiva.com/30238/1773266-a-30238966.pdf, ComponentLink2URL=https://datasheet.ciiva.com/30238/1773266-a-30238966.pdf, ComponentLink3Description=https://datasheet.ciiva.com/8914/eng-ds-1773266-a-8914649.pdf, ComponentLink3URL=https://datasheet.ciiva.com/8914/eng-ds-1773266-a-8914649.pdf, Depth=1.2mm, Lead Free="Lead Free", Length=2mm, Military Standard=Not, Mount="Surface Mount", Packaging="Tape and Reel", Pricing 1="1=0.21, 10=0.2, 25=0.1708, 50=0.1496, 100=0.1389, 250=0.1229, 500=0.1175, 1000=0.0962 (USD)", Radiation Hardening=No, Stock 1=27299, Supplier 1=Digi-Key
AUX6: "3.50mm (0.141\", 1/8\", Mini Plug) - Headphone Phone Jack Mono Connector Solder", Case/Package=SMD/SMT, Current Rating=1A, Manufacturer=CUI, Manufacturer Part Number=MJ-3523-SMT-TR, Contact Plating=Silver, Gender=Female, Lead Free="Lead Free", Packaging="Cut Tape", Pricing 1="1=1.02, 10=0.9, 25=0.8476, 50=0.8122, 100=0.7768, 250=0.7062 (USD)", Shielding=Unshielded, Stock 1=44959, Supplier 1=Digi-Key, Supplier Part Number 1=CP-3523MJCT-ND, Termination=Solder
C1 C2 C5 C20 C29 C33 C36 C38 C39 C42 C43: "Cap Ceramic 10uF 16V X5R 10% SMD 0805 85C T/R", Capacitance=10uF, Case/Package=0805, Case Code (Metric)=2012, Dielectric=X5R, Manufacturer="Johanson Dielectrics", Manufacturer Part Number=160R15X106KV4E, Max Operating Temperature=85°C, Min Operating Temperature=-55°C, Package Quantity=2000, Supplier Part Number 1=709-1229-1-ND, Tolerance=10%, Voltage Rating=16V, Case Code (Imperial)=0805, ComponentLink1Description=https://datasheet.ciiva.com/26948/getdatasheetpartid-132904-26948555.pdf, ComponentLink1URL=https://datasheet.ciiva.com/26948/getdatasheetpartid-132904-26948555.pdf, Depth=1.27mm, Height=1.27mm, Length=2.03mm, Mount="Surface Mount", Number of Pins=2, Packaging="Tape and Reel", Pricing 1="1=0.55, 10=0.387, 100=0.2552, 500=0.189, 1000=0.1607 (USD)", Radiation Hardening=No, REACH SVHC="No SVHC", Stock 1=36636, Supplier 1=Digi-Key, Termination=SMD/SMT, Thickness=0.06inch, Voltage Rating (DC)=16V, Weight=0.000194oz, Width=1.27mm
C3 C4 C6 C18 C25 C27 C28 C31 C32 C37 C40 C41 C45 C46 C47: "Cap Ceramic 0.1uF 250V X7T 10% SMD 0805 125C Plastic T/R", Capacitance=100nF, Case/Package=0805, Case Code (Metric)=2012, Dielectric=X7T, Manufacturer=TDK, Manufacturer Part Number=C2012X7T2E104K125AE, Max Operating Temperature=125°C, Min Operating Temperature=-55°C, Package Quantity=1, Supplier Part Number 1=445-8883-1-ND, Tolerance=10%, Voltage Rating=250V, Case Code (Imperial)=0805, ComponentLink1Description=https://datasheet.ciiva.com/24219/c2012x7t2e104k125ae-265154-24219519.pdf, ComponentLink1URL=https://datasheet.ciiva.com/24219/c2012x7t2e104k125ae-265154-24219519.pdf, Composition=Ceramic, Depth=1.25mm, Height=1.25mm, Length=2mm, Packaging="Tape and Reel", Pricing 1="1=0.37, 10=0.25, 100=0.1419, 500=0.1002, 1000=0.0877 (USD)", REACH SVHC="No SVHC", Stock 1=30376, Supplier 1=Digi-Key, Termination=SMD/SMT, Thickness=0.049inch, Voltage Rating (DC)=250V, Weight=0.000194oz, Width=0.05inch
C7 C8 C9 C10 C11 C30: library part CAP_RAD_220u_25V, Capacitance=220uF, Case/Package=SMD/SMT, Dielectric Material=Aluminium, Leakage Current=3uA, Manufacturer=Nichicon, Manufacturer Part Number=UWT1E221MNL1GS, Max Operating Temperature=105°C, Min Operating Temperature=-55°C, Package Quantity=500, Ripple Current=155mA, Supplier Part Number 1=493-2192-1-ND, Tolerance=20%, Voltage=25V, ComponentLink1Description=https://datasheet.ciiva.com/97/e-wt-97056.pdf, ComponentLink1URL=https://datasheet.ciiva.com/97/e-wt-97056.pdf, ComponentLink2Description=https://datasheet.ciiva.com/97/e-wt-97057.pdf, ComponentLink2URL=https://datasheet.ciiva.com/97/e-wt-97057.pdf, ComponentLink3Description=https://datasheet.ciiva.com/30522/getdatasheetpartid-450026-30522226.pdf, ComponentLink3URL=https://datasheet.ciiva.com/30522/getdatasheetpartid-450026-30522226.pdf, ComponentLink4Description=https://datasheet.ciiva.com/5360/e-wt-30307-5360729.pdf, ComponentLink4URL=https://datasheet.ciiva.com/5360/e-wt-30307-5360729.pdf, ComponentLink5Description=https://datasheet.ciiva.com/7851/e-wt-7851755.pdf, ComponentLink5URL=https://datasheet.ciiva.com/7851/e-wt-7851755.pdf, ComponentLink6Description=https://datasheet.ciiva.com/17526/e-wt-17526956.pdf, ComponentLink6URL=https://datasheet.ciiva.com/17526/e-wt-17526956.pdf, ComponentLink7Description=https://datasheet.ciiva.com/28458/1910938-28458412.pdf, ComponentLink7URL=https://datasheet.ciiva.com/28458/1910938-28458412.pdf, ComponentLink8Description=https://datasheet.ciiva.com/97/e-wt-97055.pdf, ComponentLink8URL=https://datasheet.ciiva.com/97/e-wt-97055.pdf, Diameter=8mm, Dissipation Factor=0.16%, Height=10mm, Height - Seated (Max)=0.394inch, Lead Free="Lead Free", Lead Pitch=3.1mm, Length=10mm, Life (Hours)=1000Hour, Mount="Surface Mount", Number of Pins=2, Packaging="Tape and Reel", Pricing 1="1=0.44, 10=0.309, 100=0.2034 (USD)", Radiation Hardening=No, REACH SVHC="No SVHC", Ripple Current (AC)=155mA, Stock 1=22315, Supplier 1=Digi-Key, Termination=SMD/SMT, Voltage Rating=25V, Voltage Rating (DC)=25V
C12 C14 C22: "CAP CER 1UF 100V X7S 0805", Capacitance=1uF, Case/Package=0805, Case Code (Metric)=2012, Dielectric=X7S, Manufacturer=TDK, Manufacturer Part Number=C2012X7S2A105K125AE, Max Operating Temperature=125°C, Min Operating Temperature=-55°C, Package Quantity=1, Supplier Part Number 1=445-8887-1-ND, Tolerance=10%, Voltage Rating=100V, Case Code (Imperial)=0805, ComponentLink1Description=https://datasheet.ciiva.com/6252/mlcc-commercial-soft-en-6252535.pdf, ComponentLink1URL=https://datasheet.ciiva.com/6252/mlcc-commercial-soft-en-6252535.pdf, ComponentLink2Description=https://datasheet.ciiva.com/6252/mlcc-commercial-soft-en-6252538.pdf, ComponentLink2URL=https://datasheet.ciiva.com/6252/mlcc-commercial-soft-en-6252538.pdf, ComponentLink3Description=https://datasheet.ciiva.com/6252/mlcc-commercial-soft-en-6252540.pdf, ComponentLink3URL=https://datasheet.ciiva.com/6252/mlcc-commercial-soft-en-6252540.pdf, ComponentLink4Description=https://datasheet.ciiva.com/24219/c2012x7s2a105k125ae-265181-24219982.pdf, ComponentLink4URL=https://datasheet.ciiva.com/24219/c2012x7s2a105k125ae-265181-24219982.pdf, Composition=Ceramic, Depth=1.25mm, Height=1.25mm, Lead Free="Lead Free", Length=2mm, Packaging="Tape and Reel", Pricing 1="1=0.46, 10=0.327, 100=0.2152, 500=0.1594, 1000=0.1355 (USD)", Stock 1=75778, Supplier 1=Digi-Key, Termination=SMD/SMT, Thickness=0.049inch, Voltage Rating (DC)=100V, Width=0.05inch
C13 C23 C34 C35 C44: "22µF ±20% 25V X5R Ceramic Capacitor -55°C ~ 85°C Surface Mount, MLCC 0805 (2012 Metric) 0.079\" L x 0.049\" W (2.00mm x 1.25mm)", Capacitance=22uF, Case/Package=0805, Case Code (Metric)=2012, Dielectric=X5R, Manufacturer=Samsung, Manufacturer Part Number=CL21A226MAQNNNE, Max Operating Temperature=85°C, Min Operating Temperature=-55°C, Package Quantity=1, Supplier Part Number 1=1276-2908-1-ND, Tolerance=20%, Voltage Rating=25V, Case Code (Imperial)=0805, ComponentLink1Description=https://datasheet.ciiva.com/25724/cl21a226maqnnne-25724468.pdf, ComponentLink1URL=https://datasheet.ciiva.com/25724/cl21a226maqnnne-25724468.pdf, Contact Plating=Nickel,Tin, Depth=1.25mm, Length=2mm, Mount="Surface Mount", Packaging="Tape and Reel", Pricing 1="1=0.92, 10=0.678, 100=0.465, 500=0.3681, 1000=0.31 (USD)", Stock 1=536403, Supplier 1=Digi-Key, Termination=Wraparound, Thickness=0.055inch, Width=0.049inch
C15 C17 C19 C24: library part CAP_0805_22n_100V, "CAP CER 0.022UF 100V X7R 0805", Capacitance=22nF, Case/Package=0805, Case Code (Metric)=2012, Dielectric=X7R, Manufacturer=TDK, Manufacturer Part Number=CGJ4J2X7R2A223K125AA, Max Operating Temperature=125°C, Min Operating Temperature=-55°C, Package Quantity=1, Supplier Part Number 1=445-9184-1-ND, Tolerance=10%, Voltage Rating=100V, Case Code (Imperial)=0805, ComponentLink1Description=http://www.mouser.com/ds/2/400/lcc_highreliability_midvoltage_en-520194.pdf, ComponentLink1URL=http://www.mouser.com/ds/2/400/lcc_highreliability_midvoltage_en-520194.pdf, ComponentLink2Description=http://product.tdk.com/capacitor/mlcc/en/documents/mlccspec_highreliability_en.pdf, ComponentLink2URL=http://product.tdk.com/capacitor/mlcc/en/documents/mlccspec_highreliability_en.pdf, Composition=Ceramic, Height=1.25mm, Length=0.08inch, Packaging="Tape and Reel", Pricing 1="1=0.42, 10=0.292, 100=0.175, 500=0.1312, 1000=0.1108 (USD)", Stock 1=2508, Supplier 1=Digi-Key, Termination=SMD/SMT, Thickness=0.057inch, Voltage Rating (DC)=100V, Weight=0.000194oz, Width=0.05inch
C16 C21 C26: "Cap Ceramic 100uF 10V X5R 20% SMD 1210 85C Embossed T/R", Capacitance=100uF, Case/Package=1210, Case Code (Metric)=3225, Dielectric=X5R, Dielectric Material=Ceramic, Manufacturer=Murata, Manufacturer Part Number=GRM32ER61A107ME20L, Max Operating Temperature=85°C, Min Operating Temperature=-55°C, Package Quantity=1000, Supplier Part Number 1=490-9969-1-ND, Tolerance=20%, Voltage=10V, Case Code (Imperial)=1210, ComponentLink1Description=http://components.arrow.com/part/dataview/0323_06932945, ComponentLink1URL=http://components.arrow.com/part/dataview/0323_06932945, ComponentLink2Description=http://www.mouser.com/ds/2/281/c02e-2905.pdf, ComponentLink2URL=http://www.mouser.com/ds/2/281/c02e-2905.pdf, ComponentLink3Description=http://www.farnell.com/datasheets/2079200.pdf, ComponentLink3URL=http://www.farnell.com/datasheets/2079200.pdf, ComponentLink4Description=http://psearch.en.murata.com/capacitor/product/GRM32ER61A107ME20%23.pdf, ComponentLink4URL=http://psearch.en.murata.com/capacitor/product/GRM32ER61A107ME20%23.pdf, Depth=2.5mm, Dissipation Factor=0.035%, Height=2.5mm, Lead Free="Lead Free", Length=3.2mm, Material=Ceramic, Packaging="Tape and Reel", Pricing 1="1=1.08, 10=0.822, 100=0.5882, 500=0.4554 (USD)", REACH SVHC="No SVHC", Stock 1=195702, Supplier 1=Digi-Key, Termination=SMD/SMT, Thickness=0.106inch, Voltage Rating=10V, Voltage Rating (DC)=10V, Weight=0.00388oz, Width=2.5mm
CAM7: "CONN FPC VERT 15POS 1.00MM SMD", Case/Package=SMD/SMT, Current Rating=1A, Flammability Rating="UL94 V-0", Housing Colour=Black, Manufacturer="TE Connectivity", Manufacturer Part Number=1-1734248-5, Max Operating Temperature=185°C, Min Operating Temperature=-4°C, Package Quantity=1000, Voltage Rating=125V, ComponentLink1Description=https://datasheet.ciiva.com/672/eng-cd-1734248-e1-672176.pdf, ComponentLink1URL=https://datasheet.ciiva.com/672/eng-cd-1734248-e1-672176.pdf, ComponentLink2Description=https://datasheet.ciiva.com/672/eng-cd-1734248-e1-672177.pdf, ComponentLink2URL=https://datasheet.ciiva.com/672/eng-cd-1734248-e1-672177.pdf, ComponentLink3Description=https://datasheet.ciiva.com/672/eng-cd-1734248-e1-672178.pdf, ComponentLink3URL=https://datasheet.ciiva.com/672/eng-cd-1734248-e1-672178.pdf, ComponentLink4Description=https://datasheet.ciiva.com/7989/eng-ds-1-1773440-6-0506-7989477.pdf, ComponentLink4URL=https://datasheet.ciiva.com/7989/eng-ds-1-1773440-6-0506-7989477.pdf, ComponentLink5Description=https://datasheet.ciiva.com/16660/eng-ds-1-1773440-6-0506-16660185.pdf, ComponentLink5URL=https://datasheet.ciiva.com/16660/eng-ds-1-1773440-6-0506-16660185.pdf, Connector System=Flex-to-Board, Connector Type=Connector,Receptacle,Socket, Contact Material=Bronze, Contact Plating=Gold, Depth=4.6mm, ELV=Compliant, Gender=Receptacle, Height=7.7mm, Housing Material=Thermoplastic, Length=22.4mm, Mating Alignment="Yes (With)", Max Current Rating=1A, Mount="Surface Mount", Number of Contacts=15, Number of Positions=15, Number of Rows=1, Orientation=Straight, Packaging="Tape and Reel", PCB Mount Alignment="No (Without)", PCB Mounting Orientation=Vertical, PCB Mount Retention=With, Pitch=0.039inch, Pricing 1="1=1.67, 10=1.515, 25=1.4224, 50=1.3606, 100=1.2988, 250=1.1751, 500=1.0824 (USD)", REACH SVHC=Unknown, Sealable="No (Without)", Shielding=Unshielded, Shrouded="Yes (With)", Stock 1=14321, Supplier 1=Digi-Key, Supplier Part Number 1=A101418CT-ND, Termination=SMD/SMT, Width=4.6mm, Wire/Cable Type="Flat Flex"
D2 D3 D4 D5: "Standard LEDs - SMD Surface Mount LEDs", Case/Package=SMD/SMT, Color=Red, Forward Current=20mA, Forward Voltage=2V, Lens Colour=Colorless, Manufacturer=Lumex, Manufacturer Part Number=SML-LXR85SIC-TR, Max Operating Temperature=85°C, Min Operating Temperature=-25°C, Package Quantity=1, Power Rating=80mW, Supplier Part Number 1=67-1710-1-ND, Colour=Red, ComponentLink1Description=https://datasheet.ciiva.com/2111/sml-lxr85sic-tr-2111364.pdf, ComponentLink1URL=https://datasheet.ciiva.com/2111/sml-lxr85sic-tr-2111364.pdf, ComponentLink2Description=https://datasheet.ciiva.com/2111/sml-lxr85sic-tr-2111365.pdf, ComponentLink2URL=https://datasheet.ciiva.com/2111/sml-lxr85sic-tr-2111365.pdf, ComponentLink3Description=https://datasheet.ciiva.com/2111/sml-lxr85sic-tr-2111366.pdf, ComponentLink3URL=https://datasheet.ciiva.com/2111/sml-lxr85sic-tr-2111366.pdf, ComponentLink4Description=https://datasheet.ciiva.com/4688/sml-lxr85sic-tr-115543-4688938.pdf, ComponentLink4URL=https://datasheet.ciiva.com/4688/sml-lxr85sic-tr-115543-4688938.pdf, Height=1mm, Illumination Colour=Red, Lead Free="Lead Free", Length=3.2mm, Lens Transparency=Clear, Luminous Intensity=70mcd, Mount="Surface Mount", Number of Pins=2, Packaging="Tape and Reel", Pricing 1="1=0.64, 10=0.502, 25=0.4184, 100=0.3604, 250=0.3218, 500=0.2767, 1000=0.2136 (USD)", Stock 1=10351, Supplier 1=Digi-Key, Test Current=20mA, Viewing Angle=160°, Wavelength=636nm, Width=1.5mm
D8 D9 D10 D11 D12 D13 D14 D15 D16 D17: "WP154A4SUREQBFZGC", Case/Package=Radial, Colour=Blue,Green,Red, Forward Current=20mA, Forward Voltage=3.3V, Manufacturer=Kingbright, Max Operating Temperature=85°C, Min Operating Temperature=-40°C, Package Quantity=500, Supplier Part Number 1=754-1615-ND, ComponentLink1Description=https://datasheet.ciiva.com/6349/wp154a4sureqbfzgc-6349426.pdf, ComponentLink1URL=https://datasheet.ciiva.com/6349/wp154a4sureqbfzgc-6349426.pdf, ComponentLink2Description=https://datasheet.ciiva.com/13501/wp154a4sureqbfzgc-194997-13501708.pdf, ComponentLink2URL=https://datasheet.ciiva.com/13501/wp154a4sureqbfzgc-194997-13501708.pdf, Dominant Wavelength=465nm, Height=8.6mm, Lead Free="Lead Free", Lens Style=Dome,Clear, Luminous Intensity=900mcd, Manufacturer Part Number=WP154A4SUREQBFZGC, Mount="Through Hole", Packaging=Bulk, Pricing 1="1=1.89, 10=1.534, 25=1.18, 100=1.062, 250=0.944, 500=0.8024, 1000=0.6608, 2500=0.6278, 5000=0.6136 (USD)", Stock 1=8274, Supplier 1=Digi-Key, Test Current=20mA, Viewing Angle=50°
DPWR2: "4 Position Thru Hole Connection", Colour=Green, Current=18A, Current Rating=16A, Flammability Rating="UL94 V-0", Manufacturer="Phoenix Contact", Manufacturer Part Number=1935187, Max Supply Voltage=250V, Package Quantity=250, Supplier Part Number 1=277-1579-ND, Voltage=300V, Voltage Rating (DC)=508mV, Approvals=UL, ComponentLink1Description=https://datasheet.ciiva.com/16047/1935187-16047251.pdf, ComponentLink1URL=https://datasheet.ciiva.com/16047/1935187-16047251.pdf, ComponentLink2Description=https://datasheet.ciiva.com/823/combiconcompact5-0mmseries-823770.pdf, ComponentLink2URL=https://datasheet.ciiva.com/823/combiconcompact5-0mmseries-823770.pdf, Depth=9mm, Height=11.3mm, Housing Colour=Green, Housing Material=Polyamide, Insulation Material=Nylon, Lead Free="Lead Free", Length=20mm, Material=Nylon, Max Current Rating=16A, Mount="Through Hole", Number of Circuits=4, Number of Contacts=4, Number of Levels=1, Number of Poles=4, Number of Positions=4, Number of Positions Per Level=4, Number of Rows=1, Orientation=Straight, Packaging=Bulk, Pitch=5mm, Pricing 1="1=0.77, 10=0.736, 50=0.704, 100=0.6848, 250=0.64, 500=0.5888, 1000=0.544 (USD)", Radiation Hardening=No, Stock 1=5969, Supplier 1=Digi-Key, Termination=Screw, Voltage Rating=250V, Weight=0.134041oz, Width=15mm, Wire/Cable Gauge=14AWG, Wire Gauge (Max)=26AWG, Wire Gauge (Min)=12AWG
FAN4: "FAN AXIAL 30X10MM 5VDC WIRE", Current Rating=110mA, Manufacturer="Delta Design", Max Operating Temperature=158°C, Max Power Dissipation=550mW, Min Operating Temperature=14°C, Package Quantity=720, Supplier Part Number 1=603-1847-ND, Airflow=3.4CFM, Bearing Type=Sleeve, ComponentLink1Description=//media.digikey.com/pdf/Data%20Sheets/Delta%20PDFs/ASB0305MA-CA8Z_Spec.pdf, ComponentLink1URL=//media.digikey.com/pdf/Data%20Sheets/Delta%20PDFs/ASB0305MA-CA8Z_Spec.pdf, Manufacturer Part Number=ASB0305MA-CA8Z, Noise=23dBA, Pricing 1="1=6.96, 10=6.38, 50=5.365 (USD)", RPM=9000RPM, Stock 1=98, Supplier 1=Digi-Key, Termination="3 Wire Leads", Weight=0.015lb, Width=10mm
FUSE3: "FUSE 1.00A 0805 VFAST SMD", Case/Package=0805, Case Code (Metric)=2012, Current Rating=1A, DC Cold Resistance=185mR, Manufacturer=Vishay, Manufacturer Part Number=MFU0805FF01000P100, Max Operating Temperature=125°C, Min Operating Temperature=-55°C, Package Quantity=1000, Supplier Part Number 1=MFU08051.00CT-ND, Voltage Rating (DC)=32V, Approvals=UL, Case Code (Imperial)=0805, ComponentLink1Description=https://datasheet.ciiva.com/22662/1913674-22662919.pdf, ComponentLink1URL=https://datasheet.ciiva.com/22662/1913674-22662919.pdf, ComponentLink2Description=https://datasheet.ciiva.com/3018/mfuserie-3018078.pdf, ComponentLink2URL=https://datasheet.ciiva.com/3018/mfuserie-3018078.pdf, Depth=1.25mm, Fuse Current=1A, Height=0.018inch, Housing Material=Ceramic, Lead Free="Lead Free", Length=0.079inch, Mount="Surface Mount", Packaging="Tape and Reel", Pricing 1="1=0.49, 5=0.474, 10=0.459, 50=0.3866, 100=0.3209, 250=0.2917, 500=0.248 (USD)", REACH SVHC=Unknown, Stock 1=41804, Supplier 1=Digi-Key, Width=0.049inch
J3: "40 Positions Header, Unshrouded Connector 0.079\" (2.00mm) Surface Mount Gold, GXT™", Colour=Black, Contact Resistance=25mR, Current Rating=2A, Insulation Resistance=1GR, Manufacturer="Amphenol FCI", Manufacturer Part Number=57202-G52-20LF, Max Operating Temperature=125°C, Max Voltage Rating (AC)=650V, Min Operating Temperature=-55°C, Package Quantity=100, Supplier Part Number 1=609-2632-ND, ComponentLink1Description=https://datasheet.ciiva.com/9473/57202-9473862.pdf, ComponentLink1URL=https://datasheet.ciiva.com/9473/57202-9473862.pdf, ComponentLink2Description=https://datasheet.ciiva.com/711/57202-711726.pdf, ComponentLink2URL=https://datasheet.ciiva.com/711/57202-711726.pdf, Connector Type="Male Pin", Contact Gender=Male, Contact Material="Bronze,Copper Alloy", Contact Mating Length=0.157inch, Contact Plating=Nickel,Gold,GXT, Depth=4mm, Gender=Male, Housing Colour=Black, Housing Material=Thermoplastic, Lead Free="Lead Free", Length=40mm, Mating Post Length=4mm, Mount="Surface Mount", Number of Contacts=40, Number of Positions=40, Number of Rows=2, Orientation=Straight, Packaging=Bulk, Pitch=2mm, Pricing 1="1=4.58, 10=4.395, 100=3.6624, 500=3.113, 1000=2.6552 (USD)", Radiation Hardening=No, REACH SVHC="No SVHC", Row Spacing=0.079inch, Stock 1=3189, Supplier 1=Digi-Key, Termination=Solder, Voltage Rating=650V, Width=4mm
J4: "60 Position Connector Plug, Center Strip Contacts Surface Mount Gold", Case/Package=SMD/SMT, Contact Resistance=50mR, Current Rating=500mA, Flammability Rating="UL94 V-0", Manufacturer="Amphenol FCI", Manufacturer Part Number=61083-064402LF, Max Operating Temperature=125°C, Max Voltage Rating (AC)=100V, Min Operating Temperature=-40°C, Package Quantity=600, Supplier Part Number 1=609-1681-1-ND, ComponentLink1Description=https://datasheet.ciiva.com/15208/getdatasheetpartid-64898-15208309.pdf, ComponentLink1URL=https://datasheet.ciiva.com/15208/getdatasheetpartid-64898-15208309.pdf, ComponentLink2Description=https://datasheet.ciiva.com/17088/70248518-17088294.pdf, ComponentLink2URL=https://datasheet.ciiva.com/17088/70248518-17088294.pdf, ComponentLink3Description=https://datasheet.ciiva.com/394/61083-394311.pdf, ComponentLink3URL=https://datasheet.ciiva.com/394/61083-394311.pdf, ComponentLink4Description=https://datasheet.ciiva.com/5129/61083-5129495.pdf, ComponentLink4URL=https://datasheet.ciiva.com/5129/61083-5129495.pdf, ComponentLink5Description=https://datasheet.ciiva.com/10034/61083-10034439.pdf, ComponentLink5URL=https://datasheet.ciiva.com/10034/61083-10034439.pdf, ComponentLink6Description=https://datasheet.ciiva.com/394/61083-394312.pdf, ComponentLink6URL=https://datasheet.ciiva.com/394/61083-394312.pdf, ComponentLink7Description=https://datasheet.ciiva.com/394/61083-394313.pdf, ComponentLink7URL=https://datasheet.ciiva.com/394/61083-394313.pdf, Connector Type=Plug, Contact Material="Brass,Copper Alloy", Contact Plating=Nickel,Gold, Depth=6mm, Gender=Male, Housing Material=Polymer, Lead Free="Lead Free", Length=29.8mm, Mount="Surface Mount", Number of Contacts=60, Number of Positions=60, Number of Rows=2, Orientation=Straight, Packaging="Tape and Reel", Pitch=0.8mm, Pricing 1="1=6.36, 10=6.094, 25=5.5644, 50=5.2994, 100=5.0344, 250=4.5044 (USD)", Stack Height=7.7mm, Stock 1=579, Supplier 1=Digi-Key, Termination=Solder, Voltage Rating=100V, Width=6mm
J5: "Conn Socket Strip RCP 16 POS 2mm Solder ST SMD Tube", Case/Package=SMD/SMT, Colour=Black, Contact Resistance=25mR, Manufacturer=Molex, Manufacturer Part Number=0791091007, Max Operating Temperature=105°C, Max Voltage Rating (AC)=125V, Min Operating Temperature=-55°C, Supplier Part Number 1=WM18703-ND, ComponentLink1Description=https://datasheet.ciiva.com/10078/0791091007-pcb-receptacles-10078749.pdf, ComponentLink1URL=https://datasheet.ciiva.com/10078/0791091007-pcb-receptacles-10078749.pdf, Connector Type=Receptacle,Socket, Contact Material=Bronze, Contact Plating=Nickel,Gold, Depth=4.19mm, Gender=Female, Housing Colour=Black, Housing Material=Polymer, Length=16.19mm, Number of Contacts=16, Number of Positions=16, Number of Rows=2, Orientation=Straight, Packaging=Rail/Tube, Pitch=2mm, Pricing 1="1=2.66, 10=2.554, 100=2.1284, 500=1.8091, 1000=1.5431, 5000=1.3835 (USD)", Row Spacing=0.079inch, Stock 1=8937, Supplier 1=Digi-Key, Termination=Solder
MH2 MH3 MH4 MH5: "Mounting Hole For Board"
MIC6: "MIC MEMS ANALOG OMNI -42DB", Manufacturer=Knowles, Operating Supply Current=250uA, Package Quantity=1200, Supplier Part Number 1=423-1138-1-ND, Voltage Rating=3.6V, ComponentLink1Description=https://datasheet.ciiva.com/5300/spu0410hr5h-58393-5300133.pdf, ComponentLink1URL=https://datasheet.ciiva.com/5300/spu0410hr5h-58393-5300133.pdf, ComponentLink2Description=https://datasheet.ciiva.com/1/spu0410hr5h-pb-1958.pdf, ComponentLink2URL=https://datasheet.ciiva.com/1/spu0410hr5h-pb-1958.pdf, ComponentLink3Description=https://datasheet.ciiva.com/1/spu0410hr5h-pb-1959.pdf, ComponentLink3URL=https://datasheet.ciiva.com/1/spu0410hr5h-pb-1959.pdf, Depth=1.2mm, Direction=Omnidirectional, Height=1.2mm, Impedance=300R, Length=3.76mm, Manufacturer Part Number=SPU0410HR5H-PB, Packaging="Tape and Reel", Pricing 1="1=0.94, 10=0.806, 25=0.6476, 50=0.5756, 100=0.5036, 250=0.4892, 500=0.4748 (USD)", Shape=Rectangular, Signal to Noise Ratio (SNR)=59dB, Stock 1=176050, Supplier 1=Digi-Key, Termination=SMD/SMT, Width=2.95mm
PWR2: "DC Barrel Jack 2.1mm x 5.5mm 12V 5A", Manufacturer="Memory Protection Devices", Supplier Part Number 1=EJ503A-ND, Manufacturer Part Number=EJ503A, Stock 1=0, Supplier 1=Digi-Key